# Altium PCB PCB_Project.PcbDoc
Units mil, origin at the board's own origin, x right, y up, seen from the top; angles counter-clockwise.
Board outline 3835 x 2435 mil, 2 copper layers (Top Layer, Bottom Layer); 25 components, 26 nets, 101 pads, 20 vias.
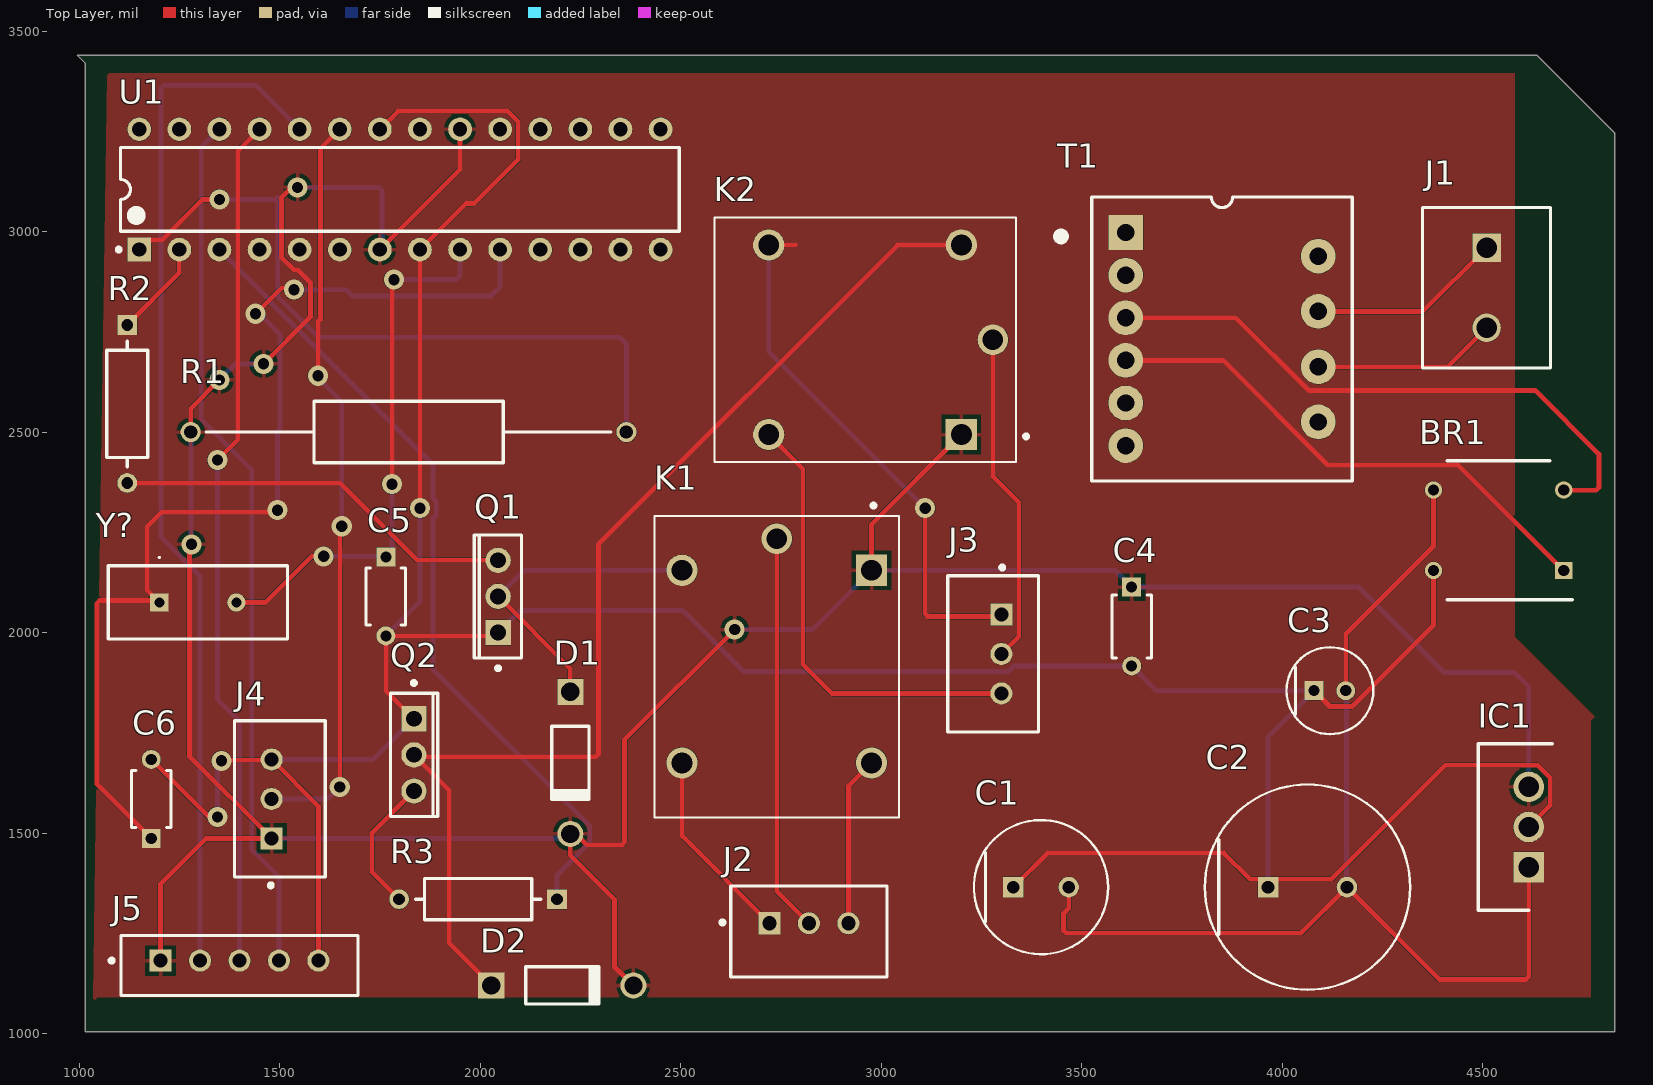
[diagram p0: Top Layer view]
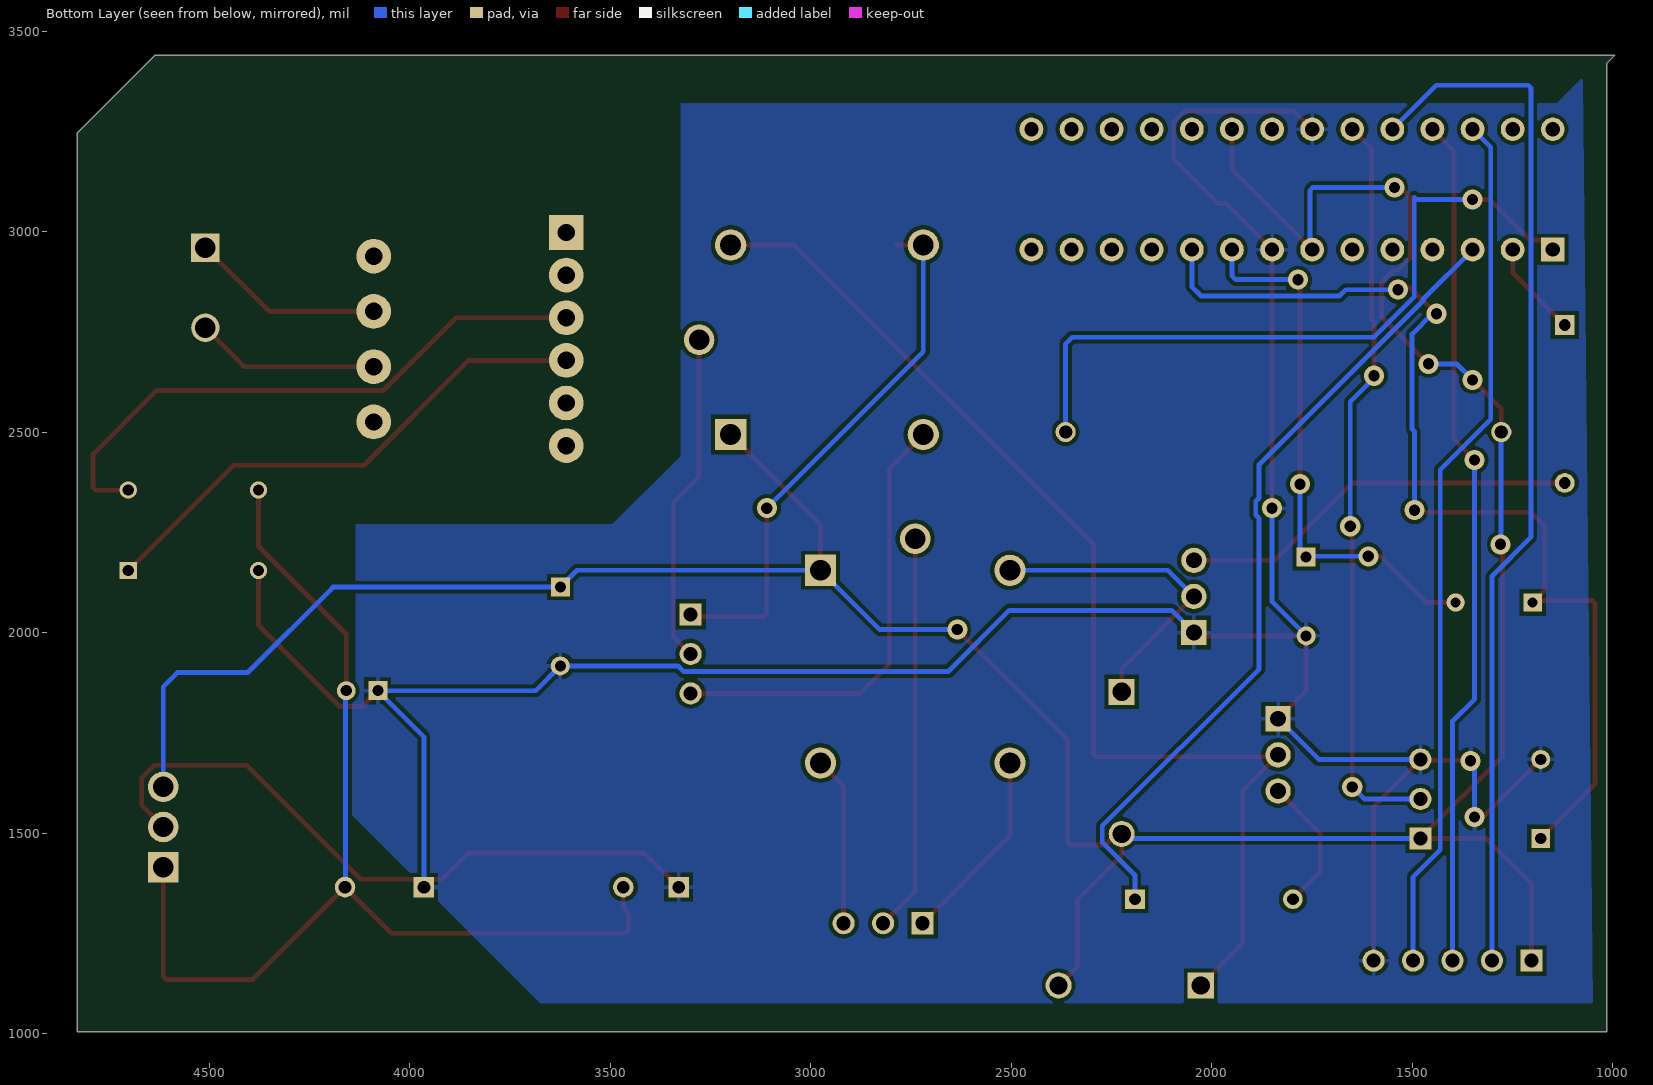
[diagram p1: Bottom Layer view, seen from below]
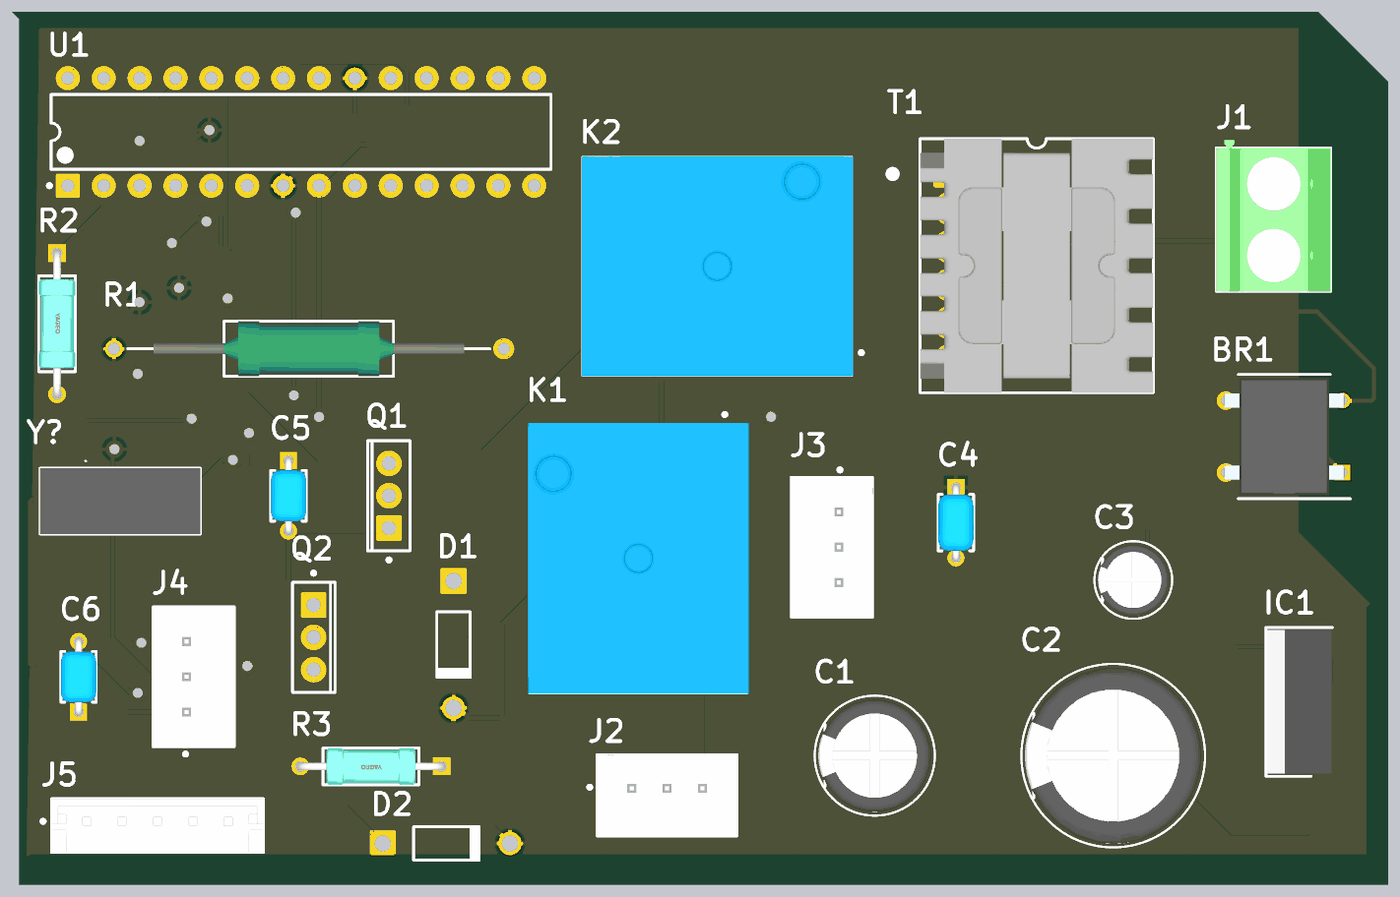
[diagram p2: 3D render of the assembled board from above, using the file's embedded part models]

## Layer stack, top to bottom
Top Solder: solder mask 0.4, Solder Resist, Dk 3.5
Top Layer: signal copper 1.4
Dielectric 1: dielectric 12.6, FR-4, Dk 4.8
Bottom Layer: signal copper 1.4
Bottom Solder: solder mask 0.4, Solder Resist, Dk 3.5

## Board outline
1015,1005 4830,1005 4830,3245 4810,3265 4635,3440 995,3440 1015,3420

## Design rules (kind name [scope] priority, off if disabled: settings)
Clearance [All] p1: gap=0 ignorepadtopadclearanceinfootprint=FALSE
PolygonConnect [All] p1: connectstyle=Relief reliefconductorwidth=10 reliefentries=4 polygonreliefangle="90 Angle" airgapwidth=10
RoutingVias [All] p1: holewidth=28 width=50 viastyle="Through Hole" minholewidth=28 minwidth=50 maxholewidth=28 maxwidth=50
SolderMaskExpansion [All] p1: expansion=4 istentingtop=FALSE
Width [All] p1: maxlimit=12 minlimit=10 preferedwidth=10
30 further rules are at their usual default settings.

## Components (designator, comment, footprint, x,y, rotation, side; value= is the part's Value field where it differs from the comment)
BR1 "DB107" DIP825W50P510L830H340Q4N 4540,2255 r180 top
C1 "EEUTA1E101" FP-RAD-TH-D_8_0_5-L_11_5-MFG 3398.9,1365 r0 top
C2 "ECA2CHG470B" FP-RAD-TH-D_12_5_0_5-L_20-MFG 4063.43,1365 r0 top
C3 "ECA2AM100" FP-RAD-TH-D_5_0_5-L_11_1-MFG 4119.37,1855 r0 top
C4 "RCER72A104K1K1H03B" FP-RCE1K1-2_5-MFG 3625,2015 r270 top
C5 "RCE5C1H220J0M1H03A" FP-RCE0K1-MFG 1765,2090 r270 top
C6 "RCE5C1H220J0M1H03A" FP-RCE0K1-MFG 1180,1585 r90 top
D1 "1N4001-T" DIOD-DO-41-P-2_V 2225,1675 r270 top
D2 "1N4001-T" DIOD-DO-41-P-2_V 2205,1120 r0 top
IC1 "LM7805CT" TO254P470X1028X1955-3P 4615,1415 r90 top
J1 "1729128" PHOE-1729128-2_V 4510,2860 r270 top
J2 "B3B-XH-A(LF)(SN)" FP-B3B-XH-A_LF_SN-MFG 2820,1254.33 r0 top
J3 "B3B-XH-A(LF)(SN)" FP-B3B-XH-A_LF_SN-MFG 3279.33,1946.57 r270 top
J4 "B3B-XH-A(LF)(SN)" FP-B3B-XH-A_LF_SN-MFG 1500.67,1585 r90 top
J5 "B5B-EH-A(LF)(SN)" FP-B5B-EH-A_LF_SN-MFG 1400,1170 r0 top
K1 "SRD-05VDC-SL-C" RELAY_SRD-05VDC-SL-C 2740,1915 r270 top
K2 "SRD-05VDC-SL-C" RELAY_SRD-05VDC-SL-C 2960,2730 r180 top
Q1 "BD139" ONSC-TO-225-3-77-09 2045,2090 r180 top
Q2 "BD139" ONSC-TO-225-3-77-09 1835,1695 r0 top
R1 "PR02000201001JR500" RESAD2760W63L1200D390 2365,2500 r180 top
R2 "MFR-25FBF52-1K18" FP-MFR-25-MFG 1120,2570 r270 top value=1.18kΩ
R3 "MFR-25FBF52-1K18" FP-MFR-25-MFG 1995,1335 r180 top value=1.18kΩ
T1 "7491182012" "EE16_7_4 (E16)" 3850.16,2731.85 r0 top
U1 "ATmega328-PU" 28P3 1800,3105 r90 top
Y? "ECS-160-S-4" ECS160S4 1200,2075 r0 top

## Footprints (in the part's own frame and the unit in brackets; to place one, negate y for a bottom-side part, rotate by r counter-clockwise, add the part's x,y. Pads: shape width x height; smd on the part's side, far side on the other; paste and mask are expansions set on the pad)
28P3 [mm] "28-Pin Plastic Dual In-Line Package (PDIP)"
  rect 1.5x1.5 hole 0.9: 1(-3.81,16.51)
  round 1.5 hole 0.9: 2(-3.81,13.97) 3(-3.81,11.43) 4(-3.81,8.89) 5(-3.81,6.35) 6(-3.81,3.81) 7(-3.81,1.27) 8(-3.81,-1.27) 9(-3.81,-3.81) 10(-3.81,-6.35) 11(-3.81,-8.89) 12(-3.81,-11.43) 13(-3.81,-13.97) 14(-3.81,-16.51) 15(3.81,-16.51) 16(3.81,-13.97) 17(3.81,-11.43) 18(3.81,-8.89) 19(3.81,-6.35) 20(3.81,-3.81) 21(3.81,-1.27) 22(3.81,1.27) 23(3.81,3.81) 24(3.81,6.35) 25(3.81,8.89) 26(3.81,11.43) 27(3.81,13.97) 28(3.81,16.51)
  silkscreen extent -3.93,-17.7 2.65,17.93, body extent -3.6,-17.65 3.6,17.65, height 4.58
DIOD-DO-41-P-2_V [mm] "2-Leads, Axial Lead, Body 4.635x2.36mm, Pin Spacing 9mm"
  rect 1.65x1.65 hole 1.15: 1(-4.5,0)
  round 1.65 hole 1.15: 2(4.5,0)
  silkscreen extent -2.32,-1.18 2.32,1.18, body extent -4.93,-1.18 4.93,1.18, height 2.35
DIP825W50P510L830H340Q4N [mm]
  rect 1.1x1.1 hole 0.7: 1(-4.125,2.55)
  round 1.1 hole 0.7: 2(-4.125,-2.55) 3(4.125,-2.55) 4(4.125,2.55)
  silkscreen extent -4.67,-4.4 3.25,4.4, body extent -4.25,-4.15 4.25,4.15, height 3.4
ECS160S4 [mm]
  rect 1.155x1.155 hole 0.63: 1(0,0)
  round 1.155 hole 0.63: 2(4.88,0)
  silkscreen extent -3.23,-2.32 8.12,2.9, body extent -3.23,-2.32 8.12,2.32, height 3.6
"EE16_7_4 (E16)" [mm] "THT, 10-Leads, Body 18x16.5mm (max), Pitch 2.7mm"
  rect 2.2x2.2 hole 1.1: 1(-6.1,6.75)
  round 2.2 hole 1.1: 2(-6.1,4.05) 3(-6.1,1.35) 4(-6.1,-1.35) 5(-6.1,-4.05) 6(-6.1,-6.75) 7(6.1,-5.25) 8(6.1,-1.75) 9(6.1,1.75) 10(6.1,5.25)
  silkscreen extent -10.4,-9 8.25,9, body extent -8.25,-9 8.25,9, height 18.2
FP-B3B-XH-A_LF_SN-MFG [mm]
  rect 1.4x1.4 hole 0.9 paste-1000 mask+0: 1(-2.5,0.525)
  round 1.4 hole 0.9 paste-1000 mask+0: 2(0,0.525) 3(2.5,0.525)
  silkscreen extent -5.6,-2.88 4.95,2.88, body extent -5.05,-2.98 5.05,2.98, height 0.25
FP-B5B-EH-A_LF_SN-MFG [mm]
  rect 1.4x1.4 hole 0.9 paste-1000 mask+0: 1(-5,0.3)
  round 1.4 hole 0.9 paste-1000 mask+0: 2(-2.5,0.3) 3(0,0.3) 4(2.5,0.3) 5(5,0.3)
  silkscreen extent -8.22,-1.9 7.5,1.9, body extent -7.6,-2 7.6,2, height 0.25
FP-MFR-25-MFG [mm]
  rect 1.25x1.25 hole 0.75 paste-1000 mask+0: 1(-5,0)
  round 1.25 hole 0.75 paste-1000 mask+0: 2(5,0)
  silkscreen extent -3.98,-1.3 3.98,1.3, body extent -5.72,-1.4 5.72,1.4, height 0.25
FP-RAD-TH-D_5_0_5-L_11_1-MFG [mm]
  rect 1.2x1.2 hole 0.7 paste-1000 mask+0: 1(-1,0)
  round 1.2 hole 0.7 paste-1000 mask+0: 2(1,0)
  silkscreen extent -2.75,-2.75 2.75,2.75, body extent -2.85,-2.85 2.85,2.85, height 0.25
FP-RAD-TH-D_8_0_5-L_11_5-MFG [mm]
  rect 1.3x1.3 hole 0.8 paste-1000 mask+0: 1(-1.75,0)
  round 1.3 hole 0.8 paste-1000 mask+0: 2(1.75,0)
  silkscreen extent -4.25,-4.25 4.25,4.25, body extent -4.35,-4.35 4.35,4.35, height 0.25
FP-RAD-TH-D_12_5_0_5-L_20-MFG [mm]
  rect 1.3x1.3 hole 0.8 paste-1000 mask+0: 1(-2.5,0)
  round 1.3 hole 0.8 paste-1000 mask+0: 2(2.5,0)
  silkscreen extent -6.5,-6.5 6.5,6.5, body extent -6.6,-6.6 6.6,6.6, height 0.25
FP-RCE0K1-MFG [mm]
  rect 1.2x1.2 hole 0.7 paste-1000 mask+0: 1(-2.5,0)
  round 1.2 hole 0.7 paste-1000 mask+0: 2(2.5,0)
  silkscreen extent -1.8,-1.25 1.8,1.25, body extent -3.2,-1.35 3.2,1.35, height 0.25
FP-RCE1K1-2_5-MFG [mm]
  rect 1.2x1.2 hole 0.7 paste-1000 mask+0: 1(-2.5,0)
  round 1.2 hole 0.7 paste-1000 mask+0: 2(2.5,0)
  silkscreen extent -2,-1.25 2,1.25, body extent -3.2,-1.35 3.2,1.35, height 0.25
ONSC-TO-225-3-77-09 [mm] "FM, 3-Leads, Body 7.8x3mm, Pitch 2.29mm"
  rect 1.6x1.6 hole 1: 1(0,2.29)
  round 1.6 hole 1: 2(0,0) 3(0,-2.29)
  silkscreen extent -1.49,-3.9 1.51,4.67, body extent -1.49,-3.9 1.51,3.9, height 13.64
PHOE-1729128-2_V [mm] "Receptacle, 2-Leads, Body 8.1x10.16mm, Pitch 5.08mm"
  rect 1.8x1.8 hole 1.3: 1(-2.54,0)
  round 1.8 hole 1.3: 2(2.54,0)
  silkscreen extent -5.08,-4.05 5.08,4.05, body extent -5.65,-4.05 5.08,4.05, height 10.01
RELAY_SRD-05VDC-SL-C [mm]
  rect 1.98x1.98 / inner round 1.98 / far side rect 1.98x1.98 hole 1.32: A1(-6.1,6)
  round 1.98 hole 1.32: A2(-6.1,-6) NC(6.1,6) NO(6.1,-6)
  round 1.935 hole 1.29: COM(-8.1,0)
  silkscreen extent -10.3,-7.75 9.55,7.75, body extent -9.6,-7.8 9.6,7.8, height 15.8
RESAD2760W63L1200D390 [mm]
  round 1.275 hole 0.85: 1(0,0) 2(27.6,0)
  silkscreen extent 0.99,-1.95 26.61,1.95, body extent 2.8,-1.95 24.8,1.95, height 3.9
TO254P470X1028X1955-3P [mm]
  rect 1.935x1.935 hole 1.29: 1(0,0)
  round 1.935 hole 1.29: 2(2.54,0) 3(5.08,0)
  silkscreen extent -2.73,-1.5 7.81,3.2, body extent -2.54,-1.43 7.62,3.14, height 19.38

## Part data
BR1: "Bridge Rectifier", Manufacturer_Name=Rectron, Mouser Part Number=583-DB107, Datasheet Link=https://www.rectron.com/data_sheets/db101-107.pdf, Height=3.4mm, Manufacturer_Part_Number=DB107, Mouser Price/Stock=https://www.mouser.co.uk/ProductDetail/Rectron/DB107?qs=G5AQjGfRJcLGAY%252B6bEDnbw%3D%3D
C1: library part CMP-05427-002094-1, "Aluminum Electrolytic Capacitors (Radial Lead Type) AEC-Q200 Qualified 100uF ±20% 25V", Capacitance=100uF, Case/Package=Radial, Dielectric Material=Aluminium, ESR (Equivalent Series Resistance)=130mR, Leakage Current=25uA, Max Operating Temperature=125°C, Min Operating Temperature=-40°C, Package Quantity=200, Ripple Current=500mA, Tolerance=20%, Voltage=25V, Construction=RADIAL, Contact Plating=Tin, Diameter=8mm, Height=11.5mm, Height - Seated (Max)=0.492inch, Impedance=130mR, Lead Diameter=0.6mm, Lead Length=17mm, Lead Pitch=3.5mm, Length=11.5mm, Life (Hours)=2000Hour, Mount="Through Hole", Number of Pins=2, Packaging=Bulk, Polarity=Polar, Radiation Hardening=No, RoHS Compliant=Yes, Series=TA, Termination=Radial, Voltage Rating=25V, Voltage Rating (DC)=25V
C2: library part CMP-05427-001477-1, "Aluminum Electrolytic Capacitors (Radial Lead Type) 47uF ±20% 160V", Capacitance=47uF, Case/Package=Radial, Max Operating Temperature=105°C, Min Operating Temperature=-25°C, Package Quantity=500, Ripple Current=220mA, Tolerance=20%, Voltage Rating=160V, Diameter=12.5mm, Height=20mm, Height - Seated (Max)=0.866inch, Lead Diameter=0.6mm, Lead Pitch=5mm, Lead/Base Style=Straight, Length=20mm, Life (Hours)=2000Hour, Mount="Through Hole", Packaging="Ammo Pack", Radiation Hardening=No, RoHS Compliant=Yes, Series=NHG, Termination=Radial, Voltage Rating (DC)=160V, Width=12.5mm
C3: library part CMP-05427-000869-1, "Aluminum Electrolytic Capacitors (Radial Lead Type) 10uF ±20% 100V", Capacitance=10uF, Case/Package=Radial, Dielectric Material=Aluminium, Leakage Current=3uA, Max Operating Temperature=85°C, Min Operating Temperature=-40°C, Package Quantity=200, Ripple Current=70mA, Tolerance=20%, Voltage=100V, Construction=RADIAL, Contact Plating=Tin, Diameter=5mm, Dissipation Factor=0.1%, Height=11mm, Height - Seated (Max)=0.472inch, Lead Diameter=0.5mm, Lead Free="Lead Free", Lead Pitch=2mm, Lead/Base Style=Straight, Length=11mm, Life (Hours)=2000Hour, Mount="Through Hole", Number of Pins=2, Packaging=Bulk, Polarity=Polar, Radiation Hardening=No, REACH SVHC="No SVHC", Ripple Current (AC)=70mA, RoHS Compliant=Yes, Series=M, Termination=Radial, Voltage Rating=100V, Voltage Rating (DC)=100V, Width=5mm
C4: library part CMP-06035-011084-1, "Cap Ceramic Monolithic 100nF 100V 10% Thru-Hole Bulk", Capacitance=100nF, Case/Package=Radial, Dielectric=X7R, Max Operating Temperature=125°C, Min Operating Temperature=-55°C, Package Quantity=500, Ratings=AEC-Q200, Resistor Type=Ceramic, Tolerance=10%, Voltage Rating=100V, Height=3.5mm, Height - Seated (Max)=0.138inch, Lead Diameter=0.5mm, Lead Pitch=0.197inch, Lead/Base Style="Formed Leads", Length=0.157inch, Mount="Through Hole", Packaging=Bulk, Termination=Radial, Voltage Rating (DC)=100V, Width=0.098inch
C5 C6: library part CMP-06035-004895-1, "Cap Ceramic 22pF 50V C0G ±5% Radial 5mm +125°C Automotive Bulk", Capacitance=22pF, Case/Package=Radial, Dielectric=C0G, Max Operating Temperature=125°C, Min Operating Temperature=-55°C, Package Quantity=2000, Ratings=AEC-Q200, Resistor Type=Ceramic, Tolerance=5%, Voltage Rating=50V, Height=3.5mm, Height - Seated (Max)=0.138inch, Lead Diameter=0.5mm, Lead Pitch=0.197inch, Lead/Base Style="Formed Leads", Length=0.142inch, Mount="Through Hole", Packaging="Tape and Reel", Termination=Radial, Voltage Rating (DC)=50V, Width=0.098inch
D1 D2: library part CMP-0639-00006-2, "1.0 A Rectifier, 15 pF, 50 V, -65 to 150 degC, 2-Pin DO-41 Plastic, RoHS, Tape and Reel", Manufacturer="Diodes Inc", Max. Average Rectified Current IO (A)=1, Operating Temperature Range (degC)="-65 to 150", ComponentLink1Description="Manufacturer URL", ComponentLink1URL=http://diodes.com/, ComponentLink2Description=Datasheet, ComponentLink2URL=http://diodes.com/datasheets/ds28002.pdf, CT (pF)=15, DatasheetVersion="Rev. 8-2", Max. IFSM (A)=30, Max. IR (uA)=5, Mounting Technology="Through Hole", PackageDescription="2-Pin Axial Lead, Body 4.635 x 2.36 mm, Lead Spread 25.4 mm", PackageReference=DO-41-P-2, Packing="Tape and Reel", PartNumber=1N4001-T, RoHS=TRUE, VF (V)=1, VRRM (V)=50
IC1: "Integrated Circuit", Manufacturer_Name="Texas Instruments", Mouser Part Number=926-LM7805CT, Arrow Part Number=LM7805CT, Arrow Price/Stock=https://www.arrow.com/en/products/lm7805ct/texas-instruments?region=europe, Datasheet Link=http://www.ti.com/lit/ds/symlink/lm340.pdf, Height=4.7mm, Manufacturer_Part_Number=LM7805CT, Mouser Price/Stock=https://www.mouser.co.uk/ProductDetail/Texas-Instruments/LM7805CT?qs=QbsRYf82W3EaqXeMDVwIfQ%3D%3D
J1: library part CMP-2000-05815-1, "PCB Terminal Block, 13.5 A, 400 V, 2-Pin THD, RoHS, Bulk", Current Rating=13500mA, Manufacturer="Phoenix Contact", Package Description="2-Pin Through Hole Device, Body 8.1 x 10.16 mm, Pitch 5.08 mm", Package Reference=1729128-2, Package Version=03/2015, Voltage Rating=400V, Datasheet URL=https://datasheet.ciiva.com/16046/1729128-16046181.pdf, Datasheet Version=12/2013, Manufacturer URL=http://www.phoenixcontact.com/, Mounting Technology=ThroughHole, No. of Positions=2, No. of Rows=1, Orientation=Horizontal, Package URL=https://www.phoenixcontact.com/online/portal/pi/pxc/product_detail_page/!ut/p/b1/3VdJjqNKFDxLH8AFycySyWY2ozFsEPOMMQaDOX1XedGL_1Vdm5YXJleknhSKeBkvI6EA8ncAo3AYoDhBQGco6KN7VURTdemj9us_IEKEZo_YHiPAEWEFmDGOHMORkqKYCORBZxgL7ZoaZYcbFFUZ3fqxSY6GOuxydWUuHqz1ynmMFygu583Bob0Ewr6Sd_l-5m-kAueHiB0jpRwZwe58wwtkpxtMYd_LmGcDRU02dRNEyWt6Y2ti5pSyJ_reIkzIulrqApdnbT11V5jnCKbYNCvhEM1MCpPByat_X379-iThf08CI5GfOPqfBeS3BRoBOdD55AKVv0iLwCMq-2BrzXWSGRH7pUGD9uwXQjiph3xL0DKQwdGa0JImiIOmBNOestqgwTHSSs2oOep-78apyXQBvNi8ZLaFjvjWvcaUEBu0MC6Wbe-d6mB0FAebo2lUWinqYaZs5DAYzV0RP9yitUjnGJ0iI9xhZkT42OCQNUJJhkgWINNQLP2JFP6OpMg3JCVg70jqHT0lvKOnhHf0lPuOnnLf0VPuWx6_dxwUIvwk5WMkT0kLL1mh61l2yZVSzG3pYV_bqo-mj6uMKwKwdnnW8Jh5RTOJzMOA5c-eJDaZQw4mTMPH02PvS_ZAqNVjVTo2WyYLkwH_KU1mmmG5kjRhDqPXLwwVHvVOjCM60-fpXvTDfMGW1PVFVS1r4e4yVDk4ZdNbkUHvqPqQSeian4UD39fNKmachqdJ1NJbyk8rXT9mXTvPk3oE5meulKGgiruPJek-4I9hTT6G8ZLOyRSm2RRVbThERQad5OS28hdt4YW4vG0stgYYzsWsK4_7y6DZMjJSCqri1kyiZR5vD7pwIrNR7QwPHTcLTI5qT7eRlpHrdGiupYlqQDJ7zy_CND8fWWBoLRXxk1RVcXiBQwbTD4Xi7KL-FuO94t9xaqweXzH, Packing=Bulk, PartNumber=1729128, Pitch=5.08mm, RoHS=TRUE
J2 J3 J4: library part CMP-17439-000014-3, "CONN HEADER VERT 3POS 2.5MM", Color=Natural, Contact Resistance=20mR, Current Rating=3A, Flammability Rating="UL94 V-0", Housing Color=White, Insulation Resistance=1GR, Max Operating Temperature=85°C, Max Voltage Rating (AC)=250V, Min Operating Temperature=-25°C, Connector Type=Header, Contact Finish - Mating=TIN, Contact Material=Brass, Contact Plating=Tin, Contact Shape=Square, Contact Type="Male Pin", Depth=5.75mm, Fastening Type=Detent, Gender=Male, Housing Material=Polyamide, Insulation Color=Natural, Insulation Material=Nylon, Lead Free="Lead Free", Lead Pitch=2.5mm, Length=9.9mm, Max Current Rating=3A, Max Voltage Rating (DC)=250V, Mount="Through Hole", Number of Contacts=3, Number of Positions=3, Number of Rows=1, Orientation=Straight, Packaging=Bulk, Pitch=2.5mm, REACH SVHC="No SVHC", Series=XH, Termination=Solder, Voltage Rating=250V, Voltage Rating (AC)=250V, Wire/Cable Gauge=22AWG
J5: library part CMP-17439-000382-1, "CONN HEADER VERT 5POS 2.5MM", Color=Natural, Current Rating=3A, Flammability Rating="UL94 V-0", Housing Color=White, Voltage Rating=250V, Connector Type=Header, Contact Finish - Mating=TIN, Contact Material=Brass, Contact Mating Length=0.13inch, Contact Plating=Tin, Contact Shape=Square, Contact Type="Male Pin", Fastening Type=Friction, Gender=Male, Insulation Color=Natural, Insulation Material=Nylon, Lead Free="Lead Free", Mated Stacking Heights=8.1mm, Mount="Through Hole", Number of Contacts=5, Number of Positions=5, Number of Rows=1, Orientation=Straight, Packaging=Bulk, Pitch=2.5mm, Series=EH, Termination=Solder
K1 K2: "5V Trigger Relay Module For Arduino And Raspberry Pi 5V Trigger Relay Module For Arduino And Raspberry Pi", Package="NON STANDARD-5 Songle Relay", Availability="Not in stock", Check_prices=https://www.snapeda.com/parts/SRD-05VDC-SL-C/Songle+Relay/view-part/?ref=eda, MF="Songle Relay", MP=SRD-05VDC-SL-C, Price=None, SnapEDA_Link=https://www.snapeda.com/parts/SRD-05VDC-SL-C/Songle+Relay/view-part/?ref=snap
Q1 Q2: library part CMP-1048-01271-1, "Plastic Medium-Power Silicon NPN Transistor, 3-Pin TO-225, Bulk Box", Manufacturer="On Semiconductor", ComponentLink1Description="Manufacturer URL", ComponentLink1URL=http://www.onsemi.com/, ComponentLink2Description=Datasheet, ComponentLink2URL=http://www.onsemi.com/pub_link/Collateral/BD135-D.PDF, ComponentLink3Description="Package Specification", ComponentLink3URL=http://www.onsemi.com/pub_link/Collateral/77-09.PDF, DatasheetVersion="Rev. 16", IC Continuous (A)=1.5, Mounting Technology="Through Hole", PackageDescription="3-Pin Flange Mount, Vertical Straight Lead, Body 7.6 x 2.7 mm, Pitch 2.29 mm", PackageReference=TO-225-3-77-09, PackageVersion="Rev. AC, 12/2013", Packing="Bulk Box", PartNumber=BD139, Polarity=NPN, RoHS=FALSE
R1: "Resistor", Manufacturer_Name=Vishay, Mouser Part Number=594-5083NW1K000J, Arrow Part Number=PR02000201001JR500, Arrow Price/Stock=https://www.arrow.com/en/products/pr02000201001jr500/vishay, Datasheet Link=http://www.vishay.com/docs/28729/pr010203.pdf, Manufacturer_Part_Number=PR02000201001JR500, Mouser Price/Stock=https://www.mouser.co.uk/ProductDetail/Vishay-BC-Components/PR02000201001JR500?qs=%252BZ426PJ3lGg9NbbN9v%2FwIg%3D%3D
R2 R3: library part CMP-03413-000001-1, "RES 1.18K OHM 1/4W 1% AXIAL", Manufacturer=Yageo, Package=MFR-25, Power Rating=0.25W, Resistance=1.18kΩ, Temperature="-55°C to +155°C", Temperature Coefficient=100ppm/°C, Temperature Range High=+155°C, Temperature Range Low=-55°C, Tolerance=1%, Voltage Rating=250V, Automotive=No, Category=Res, ComponentLink2Description=Datasheet, ComponentLink2URL=https://www.yageo.com/upload/media/product/products/datasheet/lr/Yageo_LR_MFR_1.pdf, Composition="Metal Film", Device Class L1="Passive Components", Device Class L2=Resistors, Device Class L3="Through-Hole Resistors", Digikey Description="RES 1.18K OHM 1/4W 1% AXIAL", Height=2.6mm, Ipc Land Pattern Name=RESAD1000W75L680D260, Lead Free=Yes, Manufacturer Part Number=MFR-25FBF52-1K18, Mouser Description="Metal Film Resistors 1.18K OHM 1/4W 1%", Octopart=https://octopart.com/mfr-25fbf52-1k18-yageo-56251681, RoHS=TRUE, Series=MFR
T1: library part CMP-1471-00001-1, "Off-Line Transformer WE-UNIT , L=0.9mH", Inductance=0.9mH, Input Voltage (AC)=85-265, Manufacturer="Wuerth Elektronik", Output Current (A)=0.6, Output Voltage (DC)=12, ComponentLink1Description="Manufacturer URL", ComponentLink1URL=http://www.we-online.com, ComponentLink2Description=Datasheet, ComponentLink2URL=http://www.we-online.de/katalog/media/pdf/7491182012.pdf, PackageReference="EE16_7_4 (E16)", PartNumber=7491182012, Turns Ratio="\"9.5\",\"1:1\""
U1: library part CMP-0095-00015-2, "8-bit AVR Microcontroller, 32KB Flash, 1KB EEPROM, 2KB SRAM, 28-pin PDIP, Industrial Grade (-40°C to 85°C)", ComponentLink1Description="Manufacturer URL", ComponentLink1URL=http://www.atmel.com/, ComponentLink2Description="ATmega48A/48PA/88A/88PA/168A/168PA/328/328P Datasheet", ComponentLink2URL=http://www.atmel.com/dyn/resources/prod_documents/8271.pdf, ComponentLink3Description="ATmega48A/48PA/88A/88PA/168A/168PA/328/328P Summary", ComponentLink3URL=http://www.atmel.com/dyn/resources/prod_documents/8271S.pdf, DatasheetVersion="revD, May-2011", PackageDescription="28-lead (0.300\"/7.62mm Wide) Plastic Dual Inline Package (PDIP)", PackageReference=28P3, PackageVersion="revB, Sep-2001", RevisionNote="DatasheetVersion updated. URLs added."
Y?: "Crystal or Oscillator", Manufacturer_Name=ECS, Mouser Part Number=520-HCU1600-S, Datasheet Link=http://www.ecsxtal.com/store/pdf/hc_49us.pdf, Height=3.5mm, Manufacturer_Part_Number=ECS-160-S-4, Mouser Price/Stock=https://www.mouser.co.uk/ProductDetail/ECS/ECS-160-S-4?qs=CNVyLAqdhH0J%2FZuif68kGw%3D%3D

## Via types
v1: diameter 50, hole 28, Top Layer to Bottom Layer, tented both sides, 20 vias

## Nets (pads, with @x,y where several pads share a name; then routed paths per layer and width w, separated by ;. In a path a pad name is that pad's centre, name@x,y a point inside that pad or via, vN(x,y) a via of type N, cw(c..) or ccw(c..) an arc to the next point about the centre after c; other vN are vias at no path point)
Blue: J5.4 U1.26 | length 2172.3
  Bottom Layer w12: U1.26 1304.63,3209.63 1304.63,2531.66 1430.7,2405.58 1430.7,1458.35 1498.43,1390.63 J5.4
GND: BR1.4 C1.1 C2.1 C3.1 C4.2 C5.2 C6.2 IC1.2 J4.3 J5.5 Q1.1 Q2.1 U1.8 U1.22 | length 8688.2
  Top Layer w12: C6.2 1326.74,1536.68 1341.68,1536.68 v1(1345,1540) ; v1(1355,1680) 1356.71,1681.71 1478.29,1681.71 J4.3 1596.85,1566.57 J5.5 ; U1.22 1795.37,3300.37 2068.79,3300.37 2095.37,3273.79 2095.37,3180.37 1984.51,3069.51 1964.51,3069.51 U1.8 v1(1850,2310) ; Q2.1 1765,1855.16 C5.2 2036.73,1991.57 Q1.1 ; C1.1 3415,1450 3855,1450 3920.41,1384.59 3945.41,1384.59 C2.1 3984.59,1384.59 4122.85,1384.59 4407.19,1668.93 4637.34,1668.93 4668.93,1637.34 4668.93,1568.93 IC1.2 ; C3.1 4119.46,1815.54 4175.09,1815.54 4377.6,2018.05 BR1.4
  Bottom Layer w12: v1(1345,1540) 1345,1672.97 1352.03,1680 v1(1355,1680) ; J4.3 1733.27,1683.43 Q2.1 ; C5.2 1850,2076.57 v1(1850,2310) ; Q1.1 2100.16,2055 2505,2055 2656.83,1903.17 3317.98,1903.17 3331.38,1916.57 C4.2 3686.57,1855 C3.1 3965,1740 C2.1
Green: J5.3 U1.25 | length 2139.5
  Top Layer w12: v1(1345,2430) 1396.63,2481.63 1396.63,3201.63 U1.25
  Bottom Layer w12: v1(1345,2430) 1345,1834.1 1400,1779.1 J5.3
NetBR1_1: BR1.1 T1.4 | length 1309.5
  Top Layer w12: T1.4 3853.12,2678.7 4114.48,2417.34 4439.67,2417.34 BR1.1
NetBR1_2: BR1.2 T1.3 | length 1506.5
  Top Layer w12: T1.3@3600,2790 3605,2785 T1.3 3884.62,2785 4065.81,2603.8 4631.2,2603.8 4790,2445 4790,2362.03 4782.97,2355 4702.8,2355 BR1.2
NetBR1_3: BR1.3 C1.2 C2.2 C3.2 IC1.1 | length 2777.3
  Top Layer w12: C1.2 3467.8,1312.11 3455,1299.32 3455,1257.03 3462.03,1250 4046.85,1250 C2.2 4391.85,1135 4607.97,1135 4615,1142.03 IC1.1 ; C3.2 4158.74,1996.3 4377.6,2215.16 BR1.3
  Bottom Layer w12: C3.2 4160.3,1853.44 4160.3,1366.56 C2.2
NetC5_1: C5.1 U1.9 Y?.2 | length 1355.2
  Top Layer w12: Y?.2 1465,2075 1580,2190 v1(1610,2190) ; v1(1780,2370) 1780,2875 v1(1785,2880)
  Bottom Layer w12: v1(1610,2190) 1763.43,2190 C5.1 1780,2203.43 v1(1780,2370) ; v1(1785,2880) 1940,2880 1950.03,2890.03 1950.03,2907.44 ; 1950,2907.47 U1.9
NetC6_1: C6.1 U1.10 Y?.1 | length 2620.7
  Top Layer w12: C6.1 1045,1621.57 1045,2072.97 1052.03,2080 Y?.1@1195,2080 ; Y?.1 Y?.1@1195,2080 ; v1(1440,2795) 1505,2860 1531.21,2860 v1(1536.21,2855) ; v1(1495,2305) 1500,2300 1205,2300 1170,2265 1170,2105 Y?.1@1195,2080
  Bottom Layer w12: v1(1440,2795) 1449.97,2795.03 1500.84,2744.16 1500.84,2507.66 1495,2501.81 v1(1495,2305) ; v1(1536.21,2855) 1666.29,2855 1682.13,2839.16 2027.13,2839.16 2050,2862.03 U1.10
NetD1_1: D1.1 K1.A2 Q1.2 | length 798.2
  Top Layer w12: Q1.2 2225,1910 D1.1
  Bottom Layer w12: Q1.2 2110.16,2155.16 K1.A2
NetD2_1: D2.1 K2.A2 Q2.2 | length 2850
  Top Layer w12: Q2.2 Q2.2@1840,1690 ; D2.1 1923.06,1224.78 1923.06,1606.94 Q2.2@1840,1690 ; K2.A2 3041.22,2966.22 2295,2220 2295,1697.03 2287.97,1690 Q2.2@1840,1690
NetJ1_1: J1.1 T1.9 | length 485.6
  Top Layer w12: T1.9 4350.75,2800.75 J1.1
NetJ1_2: J1.2 T1.8 | length 459.9
  Top Layer w12: T1.8 4412.95,2662.95 J1.2
NetJ2_1: J2.1 K1.NO | length 490.1
  Top Layer w12: K1.NO 2503.78,1492.8 J2.1
NetJ2_2: J2.2 K1.COM | length 992
  Top Layer w12: K1.COM 2740,1355 J2.2
NetJ2_3: J2.3 K1.NC | length 423.8
  Top Layer w12: J2.3 2918.43,1617.05 K1.NC
NetJ3_1: J3.1 K2.NO | length 1344.9
  Top Layer w12: K2.NO 2786.87,2966.22 ; v1(3110,2310) 3112.53,2307.47 3112.53,2297.53 3110,2295 3110,2047.03 3117.03,2040 3295,2040 J3.1
  Bottom Layer w12: K2.NO 2719.84,2700.16 v1(3110,2310)
NetJ3_2: J3.2 K2.COM | length 836.3
  Top Layer w12: K2.COM@3285,2735 3283.9,2735 K2.COM 3278.9,2389.39 3343.4,2324.89 3343.4,1989.98 J3.2
NetJ3_3: J3.3 K2.NC | length 1133.7
  Top Layer w12: K2.NC 2804.75,2408.88 2804.75,1920.43 2877.03,1848.15 J3.3
NetQ1_3: Q1.3 R2.2 | length 1004.9
  Top Layer w12: R2.2 1649.92,2373.15 1842.92,2180.16 Q1.3
NetQ2_3: Q2.3 R3.2 | length 341.6
  Top Layer w12: R3.2 1730,1403.15 1730,1499.84 Q2.3
NetR1_1: R1.1 U1.1 | length 1788.1
  Top Layer w12: U1.1 1173.53,2978.53 1205.89,2978.53 1307,3079.64 1349.64,3079.64 v1(1350,3080)
  Bottom Layer w12: v1(1350,3080) v1@1359.97,3080.03 ; v1@1360,3080 1495,3080 1495,3085 1495.37,3084.63 1495.37,2836.87 1596.01,2736.23 2348.77,2736.23 2365,2720 R1.1
Out1: R2.1 U1.2 | length 242
  Top Layer w12: R2.1 1250,2896.85 U1.2
Out2: R3.1 U1.3 | length 2043.2
  Bottom Layer w12: U1.3 1472.32,2832.68 1472.32,2829.04 1882.34,2419.01 1882.34,2335.42 1890.84,2326.92 1890.84,2293.08 1882.34,2284.58 1882.34,1908.83 2273.32,1517.85 2273.32,1476.46 2191.85,1394.99 R3.1
Proxi: J4.2 U1.23 | length 1879.9
  Top Layer w12: v1(1595.45,2640.38) 1595.45,2774.56 1601.84,2780.95 1601.84,3206.84 U1.23 ; v1(1650,1615) 1650,2172.24 1650.84,2173.08 1650.84,2206.92 1650,2207.76 1650,2260 v1(1655,2265)
  Bottom Layer w12: J4.2 1620,1585 v1(1650,1615) ; v1(1595.45,2640.38) 1590.38,2640.38 1590,2640 1655,2575 v1(1655,2265)
Red: J5.2 U1.24 | length 2610.2
  Bottom Layer w12: J5.2 1301.57,2140.67 1204.63,2237.61 1204.63,3357.97 1211.66,3365 1440,3365 U1.24
VCC: C4.1 D1.2 D2.2 IC1.3 J4.1 J5.1 K1.A1 K2.A1 R1.2 U1.7 U1.20 | length 8028.3
  Top Layer w12: J5.1 1203.15,1373.15 1316.57,1486.57 J4.1 1275,1691.57 1275,2210 1280,2215 v1(1280,2220) ; R1.2 1278.39,2558.39 v1(1350,2630) ; v1(1460,2670) 1577.06,2787.06 1577.06,2871.92 1544.91,2904.06 1536.77,2904.06 1504.63,2936.21 1504.63,3084.63 1532.53,3112.53 1542.47,3112.53 v1(1545,3110) ; U1.7 1950,3155 U1.20 ; D2.2 2335,1167.17 2335,1335 2225,1445 D1.2 2239.33,1497.83 2267.17,1470 2352.97,1470 2360,1477.03 2360,1732.55 v1(2634.8,2007.36) ; K1.A1 2976.22,2269.84 K2.A1
  Bottom Layer w12: R1.2 1279.19,2499.19 1279.19,2220.81 v1(1280,2220) ; v1(1350,2630) 1390,2670 v1(1460,2670) ; J4.1 2199.41,1486.57 2210.67,1497.83 D1.2 ; v1(1545,3110) 1747.97,3110 1755,3102.97 1755,2960 U1.7 ; v1(2634.8,2007.36) 2828.42,2007.36 K1.A1 3583.27,2155.16 C4.1 4191.57,2113.43 4405,1900 4580,1900 4615,1865 IC1.3
pads on no net: T1.1 T1.2 T1.5 T1.6 T1.7 T1.10 U1.4 U1.5 U1.6 U1.11 U1.12 U1.13 U1.14 U1.15 U1.16 U1.17 U1.18 U1.19 U1.21 U1.27 U1.28

## Polygon pours and split planes (outlines as drawn)
GND on Bottom Layer "GND_L02_P000" (solid, remove dead copper, pour order 0): 1075,3385 1140,3320 3325,3320 3325,2440 3495,2270 4135,2270 4135,1885 4310,1710 3675,1075 1050,1075
VCC on Top Layer "VCC_L01_P001" (solid, remove dead copper, pour order 1): 1070,3390 1075,3395 4580,3395 4580,1990 4780,1790 4770,1780 4770,1090 1045,1090 1035,1080

## Silkscreen, mask and mechanical layers (free items; w line width, h text height)
Mechanical 1:
  the board outline again, w7.87